# Altium PCB ROS_CAR.PcbDoc (part 6 of 13)
Units mil, origin at the board's own origin, x right, y up, seen from the top; angles counter-clockwise.
Board outline 3937.01 x 3937.01 mil, 2 copper layers (Top Layer, Bottom Layer); 201 components, 155 nets, 998 pads, 0 vias.
Unrouted connection lines stored in the file: 3.
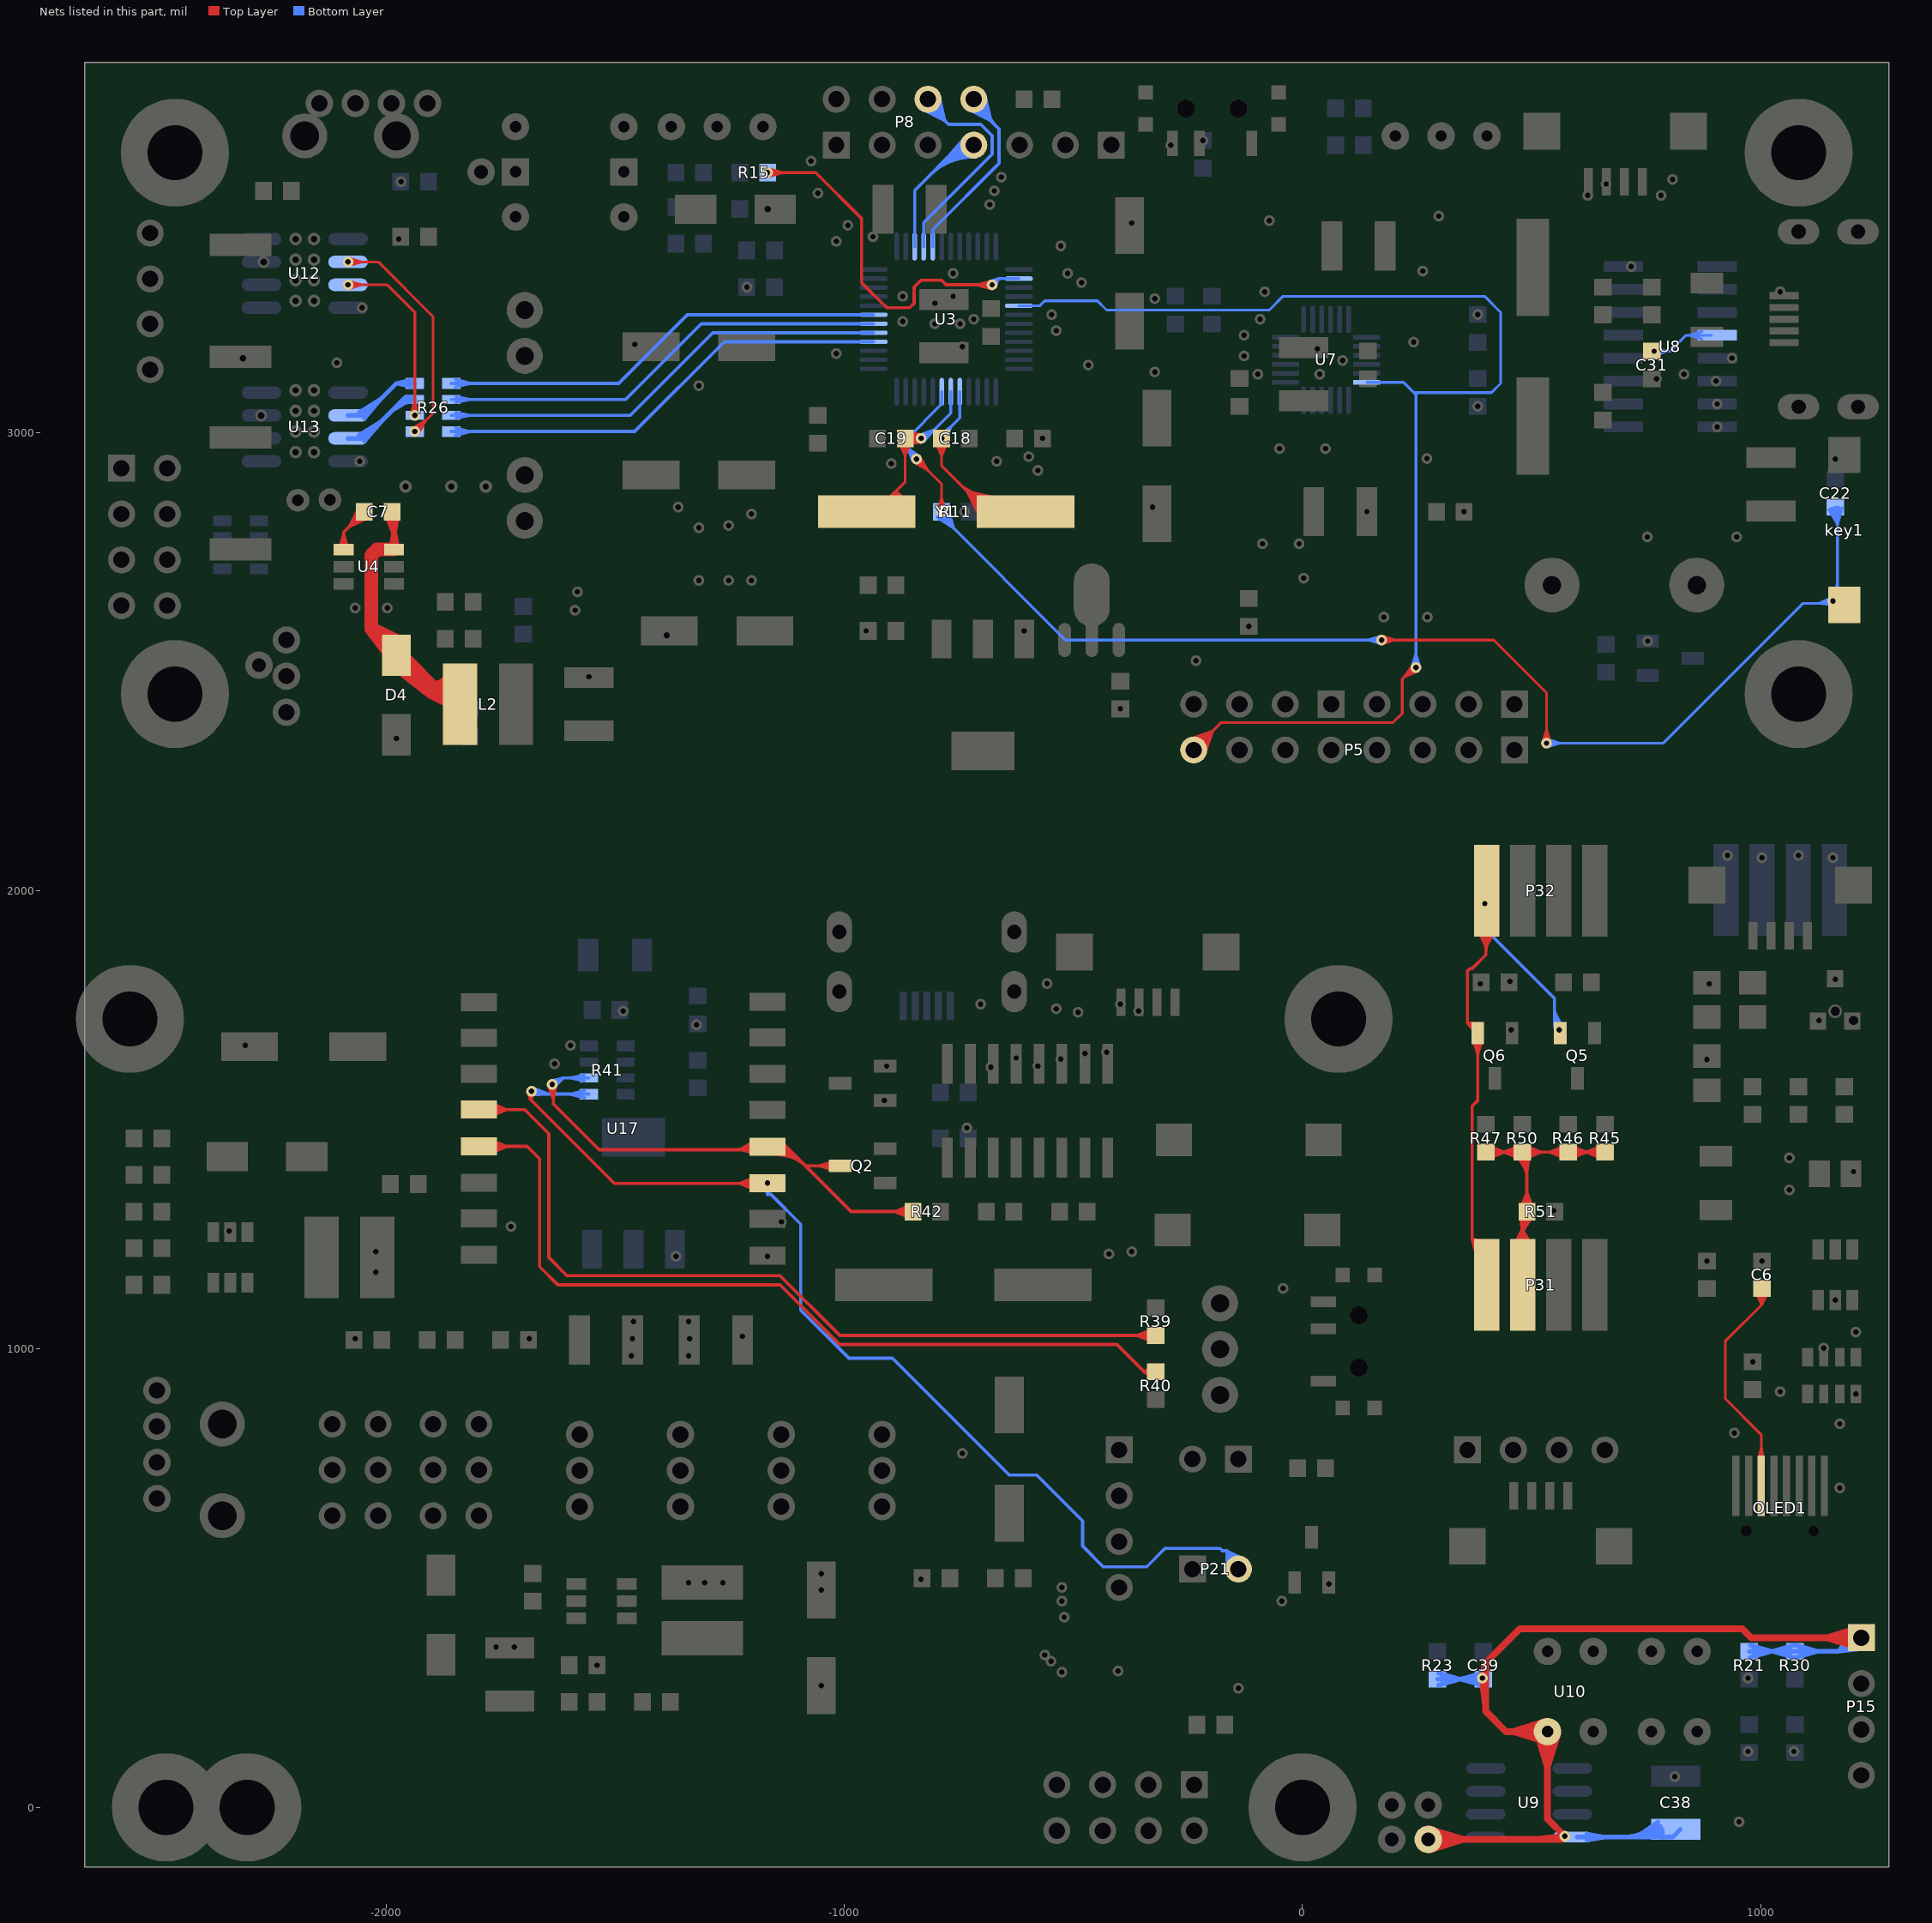
[diagram p6: the nets of this part, all layers, seen from the top]

## Nets (pads, with @x,y where several pads share a name; then routed paths per layer and width w, separated by ;. In a path a pad name is that pad's centre, name@x,y a point inside that pad or via, vN(x,y) a via of type N, cw(c..) or ccw(c..) an arc to the next point about the centre after c; other vN are vias at no path point) (continued)
GPIO0: pad.1@-1637.5,1577.5 Q2.3 R41.7 R42.1 U17.12 | length 5039.7
  Top Layer w7: pad.1@-1645.64,1575.84 -1635,1544.52 ; pad.1@-1643.38,1571.62 cw(c-1663.6,1551.4) -1635,1551.4 ; pad.1@-1637.5,1577.5 -1635,1544.52 ; -1635,1563.47 cw(c-1623.47,1563.47) pad.1@-1631.62,1571.62 ; pad.1@-1635,1575 -1635,1535 -1535,1435 U17.12@-1165,1435 ; pad.1@-1629.2,1577.08 -1635,1544.52 ; -1240.86,1435 ccw(c-1240.86,1494.64) U17.12@-1198.69,1452.47 ; -1223.96,1435 ccw(c-1223.96,1477.74) U17.12@-1193.74,1447.52 ; -1211.78,1435 cw(c-1211.78,1416.49) U17.12@-1198.69,1429.58 ; -1207.06,1435 ccw(c-1207.06,1460.84) U17.12@-1188.79,1442.57 ; U17.12@-1192.68,1456.27 -1228.27,1435 ; U17.12@-1189.58,1449.91 -1228.27,1435 ; U17.12@-1188.06,1424.86 -1228.27,1435 ; U17.12@-1187.24,1441.02 -1228.27,1435 ; U17.12@-1186.92,1431.84 -1228.27,1435 ; U17.12@-1167.56,1441.02 -1126.02,1441.02 ; U17.12@-1153.16,1425.73 -1101.4,1416.4 ; U17.12@-1151.45,1432.56 -1101.4,1416.4 ; U17.12@-1147.87,1424.84 cw(c-1147.87,1333.01) -1082.94,1397.94 ; U17.12@-1147.87,1431.84 cw(c-1147.87,1356.91) -1094.89,1409.89 ; U17.12@-1147.87,1438.84 cw(c-1147.87,1380.81) -1106.84,1421.84 ; U17.12@-1147.87,1445.84 cw(c-1147.87,1404.71) -1118.79,1433.79 ; U17.12@-1142.88,1448.73 -1101.4,1416.4 ; U17.12@-1138.19,1453.99 -1101.4,1416.4 ; U17.12@-1132.39,1436.31 cw(c-1126.02,1434.37) -1126.02,1441.02 ; U17.12@-1132.39,1445.74 ccw(c-1126.02,1447.68) -1126.02,1441.02 ; Q2.3@-1009.21,1400 -1082.15,1400 -1083.58,1398.58 ; R42.1@-860.79,1289.53 ccw(c-886.06,1264.25) -886.06,1300 ccw(c-886.06,1335.75) R42.1@-860.79,1310.47 ; R42.1@-855.84,1294.48 ccw(c-869.16,1281.15) -869.16,1300 ccw(c-869.16,1318.85) R42.1@-855.84,1305.52 ; R42.1@-853.1,1285.46 -889.62,1300 ; R42.1@-853.1,1314.54 -889.62,1300 ; R42.1@-851.09,1292.23 -889.62,1300 ; R42.1@-851.09,1307.77 -889.62,1300 ; R42.1@-850.31,1300 -985,1300 -1083.58,1398.58 ; U17.12@-1147.87,1441.02 -1126.02,1441.02 ; U17.12@-1147.87,1441.02 -1101.4,1416.4 ; U17.12@-1147.87,1441.02 -1126.02,1441.02 ; -1126.02,1441.02 -1145.94,1432.04 -1126.02,1441.02 ; -1126.02,1441.02 -1145.94,1450 -1126.02,1441.02 ; -1126.02,1441.02 -1141.88,1425.99 -1126.02,1441.02 ; -1126.02,1441.02 -1141.88,1456.06 -1126.02,1441.02 ; -1126.02,1441.02 -1083.58,1398.58 ; -1054.82,1400 Q2.3@-1020.04,1400 ; -1054.82,1400 Q2.3@-1021.56,1410.17 ; -1054.82,1400 Q2.3@-1021.56,1389.83 ; -1054.82,1400 Q2.3@-1020.04,1400 ; -1054.82,1400 Q2.3@-1021.56,1410.17 ; -1054.82,1400 Q2.3@-1021.56,1389.83 ; -1054.82,1400 Q2.3@-1020.04,1400 ; -1054.82,1400 Q2.3@-1021.56,1410.17 ; -1054.82,1400 Q2.3@-1021.56,1389.83 ; -1054.82,1400 Q2.3@-1020.04,1400 ; -1054.82,1400 Q2.3@-1021.56,1410.17 ; -1054.82,1400 Q2.3@-1021.56,1389.83 ; -1054.82,1400 Q2.3@-1020.04,1400 ; -1054.82,1400 Q2.3@-1021.56,1410.17 ; -1054.82,1400 Q2.3@-1021.56,1389.83 ; -1054.82,1400 Q2.3@-1020.04,1400 ; -1054.82,1400 Q2.3@-1021.56,1410.17 ; -1054.82,1400 Q2.3@-1021.56,1389.83 ; -1054.82,1400 Q2.3@-1020.04,1400 ; -1054.82,1400 Q2.3@-1021.56,1410.17 ; -1054.82,1400 Q2.3@-1021.56,1389.83 ; -1054.82,1400 Q2.3@-1020.04,1400 ; -1054.82,1400 Q2.3@-1021.56,1410.17 ; -1054.82,1400 Q2.3@-1021.56,1389.83 ; -1054.82,1400 Q2.3@-1020.04,1400 ; -1054.82,1400 Q2.3@-1021.56,1410.17 ; -1054.82,1400 Q2.3@-1021.56,1389.83 ; -1054.82,1400 Q2.3@-1020.04,1400 ; -1054.82,1400 Q2.3@-1021.56,1410.17 ; -1054.82,1400 Q2.3@-1021.56,1389.83 ; -1054.82,1400 Q2.3@-1020.04,1400 ; -1054.82,1400 Q2.3@-1021.56,1410.17 ; -1054.82,1400 Q2.3@-1021.56,1389.83 ; -1054.82,1400 Q2.3@-1020.04,1400 ; -1054.82,1400 Q2.3@-1021.56,1410.17 ; -1054.82,1400 Q2.3@-1021.56,1389.83 ; -1054.82,1400 Q2.3@-1020.04,1400 ; -1054.82,1400 Q2.3@-1021.56,1410.17 ; -1054.82,1400 Q2.3@-1021.56,1389.83 ; -1054.82,1400 Q2.3@-1020.04,1400 ; -1054.82,1400 Q2.3@-1021.56,1410.17 ; -1054.82,1400 Q2.3@-1021.56,1389.83 ; -1054.82,1400 Q2.3@-1020.04,1400 ; -1054.82,1400 Q2.3@-1021.56,1410.17 ; -1054.82,1400 Q2.3@-1021.56,1389.83 ; -1054.82,1400 Q2.3@-1020.04,1400 ; -1054.82,1400 Q2.3@-1021.56,1410.17 ; -1054.82,1400 Q2.3@-1021.56,1389.83 ; -1054.82,1400 Q2.3@-1020.04,1400 ; -1054.82,1400 Q2.3@-1021.56,1410.17 ; -1054.82,1400 Q2.3@-1021.56,1389.83 ; -1054.82,1400 Q2.3@-1020.04,1400 ; -1054.82,1400 Q2.3@-1021.56,1410.17 ; -1054.82,1400 Q2.3@-1021.56,1389.83 ; -1054.82,1400 Q2.3@-1020.04,1400 ; -1054.82,1400 Q2.3@-1021.56,1410.17 ; -1054.82,1400 Q2.3@-1021.56,1389.83 ; -1054.82,1400 Q2.3@-1020.04,1400 ; -1054.82,1400 Q2.3@-1021.56,1410.17 ; -1054.82,1400 Q2.3@-1021.56,1389.83 ; -1054.82,1400 Q2.3@-1020.04,1400 ; -1054.82,1400 Q2.3@-1021.56,1410.17 ; -1054.82,1400 Q2.3@-1021.56,1389.83 ; -1044.86,1400 cw(c-1044.86,1375.18) Q2.3@-1027.31,1392.73 ; -1044.86,1400 ccw(c-1044.86,1424.82) Q2.3@-1027.31,1407.27 ; -1044.86,1400 cw(c-1044.86,1375.18) Q2.3@-1027.31,1392.73 ; -1044.86,1400 ccw(c-1044.86,1424.82) Q2.3@-1027.31,1407.27 ; -1044.86,1400 cw(c-1044.86,1375.18) Q2.3@-1027.31,1392.73 ; -1044.86,1400 ccw(c-1044.86,1424.82) Q2.3@-1027.31,1407.27
  Bottom Layer w7: pad.1@-1640.55,1585.23 -1613.62,1591.38 ; pad.1@-1637.16,1578.77 ccw(c-1633.18,1593.75) -1622.21,1582.79 ; pad.1@-1635.36,1585.53 ccw(c-1629.57,1607.32) -1613.62,1591.38 ; pad.1@-1632.29,1571.02 -1613.62,1591.38 ; R41.7@-1572.08,1586.78 ccw(c-1583.17,1575.68) -1583.17,1591.38 ccw(c-1583.17,1607.07) R41.7@-1572.08,1595.97 ; R41.7@-1568.16,1584.91 -1598.48,1591.38 ; R41.7@-1568.16,1597.84 -1598.48,1591.38 ; R41.7@-1567.48,1591.38 -1598.48,1591.38 ; R41.7@-1557.48,1591.38 -1613.62,1591.38 ; -1613.62,1591.38 pad.1@-1637.5,1577.5 -1627.5,1577.5 -1613.62,1591.38
GPIO2: P21.2 pad.1@-1167.5,1362.5 pad.1@-1682.5,1562.5 R41.8 U17.11 | length 3760.5
  Top Layer w7: pad.1@-1690.77,1561.71 -1685,1545 ; pad.1@-1688.38,1556.62 cw(c-1696.53,1548.47) -1685,1548.47 ; -1685,1544.82 cw(c-1673.45,1544.82) pad.1@-1678.71,1555.1 ; pad.1@-1685,1560 -1685,1545 ; pad.1@-1682.5,1562.5 -1685,1545 ; pad.1@-1674.78,1559.42 -1685,1545 ; U17.11@-1198.69,1350.05 ccw(c-1226.32,1322.42) -1226.32,1361.5 ccw(c-1226.32,1400.57) U17.11@-1198.69,1372.94 ; U17.11@-1193.74,1355 ccw(c-1209.42,1339.32) -1209.42,1361.5 ccw(c-1209.42,1383.67) U17.11@-1193.74,1367.99 ; U17.11@-1190.46,1345.63 -1227.93,1361.5 ; U17.11@-1190.46,1377.36 -1227.93,1361.5 ; U17.11@-1189.99,1361.5 ccw(c-1189.99,1384.99) U17.11@-1173.38,1368.38 ; U17.11@-1188.28,1352.37 -1227.93,1361.5 ; U17.11@-1188.28,1370.62 -1227.93,1361.5 ; U17.11@-1187.24,1361.5 -1227.93,1361.5 ; U17.11@-1185.14,1361.5 cw(c-1185.14,1344.86) U17.11@-1173.38,1356.62 ; U17.11@-1168.8,1370.71 U17.11@-1200.35,1361.5 ; U17.11@-1168.3,1354.23 U17.11@-1200.35,1361.5 ; U17.11@-1167.56,1361.5 -1501.5,1361.5 -1685,1545 ; pad.1@-1167.5,1362.5 U17.11@-1200.35,1361.5
  Bottom Layer w7: pad.1@-1682.93,1554.2 -1644.79,1556.38 ; pad.1@-1681.57,1563.43 ccw(c-1664.56,1580.44) -1664.56,1556.38 ; pad.1@-1680.28,1570.51 -1644.79,1556.38 ; pad.1@-1676.62,1568.38 ccw(c-1647.66,1597.34) -1647.66,1556.38 ; R41.8@-1571.55,1550.5 ccw(c-1585.73,1536.31) -1585.73,1556.38 ccw(c-1585.73,1576.44) R41.8@-1571.55,1562.25 ; R41.8@-1566.72,1548.13 -1598.48,1556.38 ; R41.8@-1566.72,1564.62 -1598.48,1556.38 ; R41.8@-1565.67,1556.38 -1598.48,1556.38 ; R41.8@-1557.48,1556.38 -1671.38,1556.38 -1677.5,1562.5 pad.1@-1682.5,1562.5 -1644.79,1556.38 ; pad.1@-1175.7,1361.13 -1167.56,1337.56 ; pad.1@-1173.38,1356.62 cw(c-1187.42,1342.58) -1167.56,1342.58 ; -1167.56,1342.29 cw(c-1147.29,1342.29) pad.1@-1161.62,1356.62 ; pad.1@-1167.56,1361.5 -1167.56,1337.56 ; pad.1@-1167.5,1362.5 -1167.56,1337.56 ; pad.1@-1159.31,1361.1 -1167.56,1337.56 ; P21.2@-165.02,512.83 -165,560 ; -164.86,559.86 cw(c-186.86,537.85) P21.2@-157.78,526.77 ; -158.83,553.83 ccw(c-140,572.65) P21.2@-140,546.03 ; P21.2@-157.84,513.38 -165,560 ; -157.21,552.21 cw(c-175.79,533.64) P21.2@-151.24,524.28 ; P21.2@-150.93,514.98 -165,560 ; P21.2@-150,520 P21.2@-135,505 ; P21.2@-144.4,517.57 -165,560 ; P21.2@-135.88,522.89 -165,560 ; P21.2@-130.7,527.62 -165,560 ; P21.2@-126.23,533.13 -165,560 ; P21.2@-122.59,539.35 -165,560 ; -1167.56,1337.56 -1159.96,1337.56 -1095,1272.6 -1095,1085 -990,980 -895,980 -640,725 -580,725 -480,625 -480,570 -435,525 -340,525 -300,565 -180,565 -175,560 -165,560 ; -165,560 P21.2@-140,520 -135,525 -130,525 -165,560
GPIO14: R40.1 U17.5 | length 2267.7
  Top Layer w7: U17.5@-1797.48,1442.2 -1692.2,1442.2 -1665,1415 -1665,1180 -1625,1140 -1140,1140 -1010,1010 -405,1010 -345.31,950.31 ; U17.5@-1777.8,1442.2 -1737.11,1442.2 ; U17.5@-1776.76,1433.08 -1737.11,1442.2 ; U17.5@-1776.76,1451.33 -1737.11,1442.2 ; U17.5@-1774.58,1426.34 -1737.11,1442.2 ; U17.5@-1774.58,1458.07 -1737.11,1442.2 ; U17.5@-1771.3,1435.71 cw(c-1755.62,1420.03) -1755.62,1442.2 cw(c-1755.62,1464.38) U17.5@-1771.3,1448.7 ; U17.5@-1766.35,1430.76 cw(c-1738.72,1403.13) -1738.72,1442.2 cw(c-1738.72,1481.28) U17.5@-1766.35,1453.65 ; R40.1@-334.14,943.51 ccw(c-345.31,937.73) -345.31,950.31 ; R40.1@-334.14,957.12 cw(c-345.31,962.9) -345.31,950.31 ; R40.1@-325.49,936.21 -345.31,950.31 ; R40.1@-325.49,964.42 -345.31,950.31 ; R40.1@-322.24,942.61 -345.31,950.31 ; R40.1@-322.24,958.02 -345.31,950.31 ; R40.1@-320.98,950.31 -345.31,950.31 ; R40.1@-320,950.31 -345.31,950.31
GPIO16: R39.1 U17.4 | length 2421.7
  Top Layer w7: U17.4@-1797.48,1522.52 -1697.52,1522.52 -1645,1470 -1645,1200 -1605,1160 -1140,1160 -1009.69,1029.69 R39.1@-320,1029.69 ; U17.4@-1777.8,1522.52 -1737.11,1522.52 ; U17.4@-1776.76,1513.39 -1737.11,1522.52 ; U17.4@-1776.76,1531.65 -1737.11,1522.52 ; U17.4@-1774.58,1506.66 -1737.11,1522.52 ; U17.4@-1774.58,1538.38 -1737.11,1522.52 ; U17.4@-1771.3,1516.03 cw(c-1755.62,1500.35) -1755.62,1522.52 cw(c-1755.62,1544.69) U17.4@-1771.3,1529.01 ; U17.4@-1766.35,1511.08 cw(c-1738.72,1483.45) -1738.72,1522.52 cw(c-1738.72,1561.59) U17.4@-1766.35,1533.96 ; R39.1@-331.45,1019.21 ccw(c-356.73,993.94) -356.73,1029.69 ccw(c-356.73,1065.43) R39.1@-331.45,1040.16 ; R39.1@-326.5,1024.16 ccw(c-339.83,1010.84) -339.83,1029.69 ccw(c-339.83,1048.53) R39.1@-326.5,1035.21 ; R39.1@-323.77,1015.14 -360.29,1029.69 ; R39.1@-323.77,1044.23 -360.29,1029.69 ; R39.1@-321.76,1021.92 -360.29,1029.69 ; R39.1@-321.76,1037.45 -360.29,1029.69 ; R39.1@-320.98,1029.69 -360.29,1029.69
IN2-1: R26.6 U3.17 | length 1139.9
  Bottom Layer w7: R26.6@-1857.48,3037.09 -1467.48,3037.09 -1287.01,3217.56 U3.17@-935.94,3217.56 ; R26.6@-1847.48,3037.09 -1816.48,3037.09 ; R26.6@-1846.8,3030.62 -1816.48,3037.09 ; R26.6@-1846.8,3043.55 -1816.48,3037.09 ; R26.6@-1842.89,3032.49 cw(c-1831.79,3021.39) -1831.79,3037.09 cw(c-1831.79,3052.78) R26.6@-1842.89,3041.68 ; -987.46,3217.56 U3.17@-961.53,3217.56
IN2-2: R26.5 U3.16 | length 1158.5
  Bottom Layer w7: R26.5@-1857.48,3002.09 -1457.48,3002.09 -1261.69,3197.87 U3.16@-935.94,3197.87 ; R26.5@-1849.29,3002.09 -1816.48,3002.09 ; R26.5@-1848.24,2993.84 -1816.48,3002.09 ; R26.5@-1848.24,3010.33 -1816.48,3002.09 ; R26.5@-1843.42,2996.21 cw(c-1829.23,2982.02) -1829.23,3002.09 cw(c-1829.23,3022.15) R26.5@-1843.42,3007.96 ; -987.46,3197.87 U3.16@-961.53,3197.87
IN2_1: R26.1 U13.2 | length 487.5
  Bottom Layer w10: U13.2@-2082.99,3037.09 -2047.48,3037.09 -1977.48,3107.09 ; U13.2@-2058.62,3044.2 -2012,3072.57 ; U13.2@-2053.46,3037.09 -2012,3072.57 ; U13.2@-2053.46,3045.87 ccw(c-2053.46,3081.51) -2028.26,3056.31 ; U13.2@-2047.24,3030.9 -2012,3072.57 ; R26.1@-1950.49,3102.27 ccw(c-1962.11,3090.64) -1962.11,3107.09 ccw(c-1962.11,3123.53) R26.1@-1950.49,3111.9 ; R26.1@-1946.4,3100.31 -1977.48,3107.09 ; R26.1@-1946.4,3113.86 -1977.48,3107.09 ; R26.1@-1945.67,3107.09 -1977.48,3107.09 ; R26.1@-1937.48,3107.09 -1977.48,3107.09
IN2_2: R26.2 U13.3 | length 566
  Bottom Layer w10: U13.3@-2082.99,2987.09 -2047.48,2987.09 -1962.48,3072.09 ; U13.3@-2058.64,2994.18 -2011.35,3023.22 ; U13.3@-2053.46,2987.09 -2011.35,3023.22 ; U13.3@-2053.46,2995.87 ccw(c-2053.46,3031.51) -2028.26,3006.31 ; U13.3@-2047.24,2980.9 -2011.35,3023.22 ; -1987.11,3047.46 R26.2@-1947.48,3072.09 ; -1981.62,3052.95 cw(c-1947.48,3018.81) R26.2@-1947.48,3067.09 ; -1969.98,3064.59 cw(c-1957.81,3052.41) R26.2@-1949.81,3067.66 ; -1964.55,3070.02 cw(c-1947.48,3052.95) R26.2@-1947.48,3077.09 ; -1960.37,3074.2 cw(c-1951.19,3065.02) R26.2@-1945.16,3076.51 ; R26.2@-1951.02,3068.55 ccw(c-1959.55,3060.02) -1959.55,3072.09 ccw(c-1959.55,3084.16) R26.2@-1951.02,3075.62 ; R26.2@-1937.48,3072.09 -1962.48,3072.09 ; -1962.48,3072.09 R26.2@-1947.48,3072.09 ; -1962.48,3072.09 R26.2@-1947.48,3072.09
IN3-1: R26.7 U3.18 | length 1133.5
  Bottom Layer w7: R26.7@-1857.48,3072.09 -1477.48,3072.09 -1312.32,3237.24 U3.18@-935.94,3237.24 ; R26.7@-1847.48,3072.09 -1816.48,3072.09 ; R26.7@-1846.8,3065.62 -1816.48,3072.09 ; R26.7@-1846.8,3078.55 -1816.48,3072.09 ; R26.7@-1842.89,3067.49 cw(c-1831.79,3056.39) -1831.79,3072.09 cw(c-1831.79,3087.78) R26.7@-1842.89,3076.68 ; -987.46,3237.24 U3.18@-961.53,3237.24
IN3-2: R26.8 U3.19 | length 1139.5
  Bottom Layer w7: R26.8@-1857.48,3107.09 -1492.48,3107.09 -1342.64,3256.93 U3.19@-935.94,3256.93 ; R26.8@-1849.29,3107.09 -1816.48,3107.09 ; R26.8@-1848.24,3098.84 -1816.48,3107.09 ; R26.8@-1848.24,3115.33 -1816.48,3107.09 ; R26.8@-1843.42,3101.21 cw(c-1829.23,3087.02) -1829.23,3107.09 cw(c-1829.23,3127.15) R26.8@-1843.42,3112.96 ; -987.46,3256.93 U3.19@-961.53,3256.93
IN3_1: pad.1@-1937.48,3037.09 pad.1@-2082.99,3322.09 R26.3 U12.3 | length 581.4
  Top Layer w6: pad.1@-2082.99,3322.09 -1997.48,3322.09 -1937.48,3262.09 pad.1@-1937.48,3037.09 ; pad.1@-2081.69,3313.37 -2053.18,3322.09 pad.1@-2081.69,3330.8 ; pad.1@-2076.76,3315.86 cw(c-2061.72,3300.82) -2061.72,3322.09 cw(c-2061.72,3343.36) pad.1@-2076.76,3328.32 ; pad.1@-1946.2,3038.39 -1937.48,3066.9 pad.1@-1928.77,3038.39 ; pad.1@-1943.71,3043.32 ccw(c-1958.75,3058.36) -1937.48,3058.36 ccw(c-1916.21,3058.36) pad.1@-1931.25,3043.32
IN3_2: pad.1@-1937.48,3002.09 pad.1@-2082.99,3372.09 R26.4 U12.2 | length 697.9
  Top Layer w6: pad.1@-2082.99,3372.09 -2017.09,3372.09 -1897.48,3252.48 -1897.48,3042.09 pad.1@-1937.48,3002.09 ; pad.1@-2081.69,3363.37 -2053.18,3372.09 pad.1@-2081.69,3380.8 ; pad.1@-2076.76,3365.86 cw(c-2061.72,3350.82) -2061.72,3372.09 cw(c-2061.72,3393.36) pad.1@-2076.76,3378.32 ; pad.1@-1942.87,3009.06 -1912.94,3026.63 pad.1@-1930.51,2996.7 ; pad.1@-1937.48,3010.9 ccw(c-1937.48,3032.17) -1922.44,3017.13 ccw(c-1907.4,3002.09) pad.1@-1928.67,3002.09
IRQ: P8.8 U3.29 | length 1164.4
  Bottom Layer w7: U3.29@-807.01,3405.55 -807.01,3442.56 ; U3.29@-807.01,3431.14 -807.01,3442.56 ; P8.8@-733.95,3706.93 -680.21,3679.81 ; P8.8@-730.37,3713.09 -680.21,3679.81 ; P8.8@-726.13,3718.73 -680.21,3679.81 ; P8.8@-721.29,3723.81 -680.21,3679.81 ; P8.8@-717.48,3701.06 cw(c-717.48,3662.37) -690.12,3689.73 ; P8.8@-717.48,3708.06 cw(c-717.48,3686.27) -702.07,3701.68 ; P8.8@-713.41,3730.03 -680.21,3679.81 ; P8.8@-707.34,3733.55 -680.21,3679.81 ; P8.8@-705.46,3726.85 ccw(c-655.21,3725.89) -690.75,3690.35 ; P8.8@-700.86,3736.36 -680.21,3679.81 ; P8.8@-698.46,3726.72 ccw(c-632.39,3725.45) -679.11,3678.72 ; P8.8@-694.04,3738.4 -680.21,3679.81 ; P8.8@-691.46,3726.58 ccw(c-609.57,3725.01) -667.48,3667.09 ; -807.01,3442.56 -662.48,3587.09 -662.48,3662.09 -717.48,3717.09 P8.8@-717.48,3727.09 -680.21,3679.81
LED_POW: pad.1@-677.48,3322.09 pad.1@-1167.48,3567.09 R15.1 U3.38 | length 1122.1
  Top Layer w7: pad.1@-1167.48,3567.09 -1062.48,3567.09 -962.48,3467.09 -962.48,3327.09 -907.48,3272.09 -857.48,3272.09 -847.48,3282.09 -847.48,3317.09 -832.48,3332.09 -787.48,3332.09 -777.48,3322.09 pad.1@-677.48,3322.09 -710.29,3322.09 ; pad.1@-1166.43,3558.84 -1134.67,3567.09 pad.1@-1166.43,3575.33 ; pad.1@-1161.6,3561.21 cw(c-1147.42,3547.02) -1147.42,3567.09 cw(c-1147.42,3587.15) pad.1@-1161.6,3572.96 ; pad.1@-683.36,3316.21 ccw(c-697.54,3302.02) -697.54,3322.09 ccw(c-697.54,3342.15) pad.1@-683.36,3327.96 ; pad.1@-678.53,3313.84 -710.29,3322.09 ; pad.1@-678.53,3330.33 -710.29,3322.09
  Bottom Layer w7: pad.1@-681.95,3329.1 -663.9,3335.67 ; pad.1@-677.48,3322.09 -663.9,3335.67 ; pad.1@-677.22,3330.39 ccw(c-676.65,3348.42) -663.9,3335.67 ; pad.1@-670.47,3317.62 -663.9,3335.67 ; pad.1@-669.17,3322.35 cw(c-651.14,3322.91) -663.9,3335.67 ; U3.38@-644.61,3335.67 -663.9,3335.67 ; U3.38@-619.02,3335.67 -663.9,3335.67
M5V: P31.2 R45.1 R46.2 R47.1 R50.1 R51.2 | length 3679.9
  Top Layer w7: R47.1@400,1429.69 R50.1@480,1429.69 ; R47.1@400.98,1429.69 440.29,1429.69 ; R47.1@401.76,1421.92 440.29,1429.69 ; R47.1@401.76,1437.45 440.29,1429.69 ; R47.1@403.77,1415.14 440.29,1429.69 ; R47.1@403.77,1444.23 440.29,1429.69 ; R47.1@406.5,1424.16 cw(c419.83,1410.84) 419.83,1429.69 cw(c419.83,1448.53) R47.1@406.5,1435.21 ; R47.1@411.45,1419.21 cw(c436.73,1393.94) 436.73,1429.69 cw(c436.73,1465.43) R47.1@411.45,1440.16 ; P31.2@457.25,1218.1 480,1261 ; P31.2@463.62,1229.45 ccw(c424.07,1269) 480,1269 ; P31.2@463.8,1215.22 480,1261 ; R50.1@467.24,1424.18 489.68,1388.04 ; P31.2@468.57,1224.5 ccw(c440.97,1252.1) 480,1252.1 ; R50.1@468.55,1419.21 ccw(c443.27,1393.94) 443.27,1429.69 ccw(c443.27,1465.43) R50.1@468.55,1440.16 ; R50.1@470.51,1419.21 cw(c424.23,1372.93) 489.68,1372.93 ; P31.2@470.61,1213.35 480,1261 ; R50.1@473.5,1424.16 ccw(c460.17,1410.84) 460.17,1429.69 ccw(c460.17,1448.53) R50.1@473.5,1435.21 ; R50.1@473.52,1427.39 489.68,1388.04 ; R51.2@474.9,1299.81 480,1256.53 ; R51.2@475.14,1303.77 489.68,1340.29 ; R50.1@475.46,1424.16 cw(c441.13,1389.83) 489.68,1389.83 ; R50.1@476.23,1415.14 439.71,1429.69 ; R50.1@476.23,1444.23 439.71,1429.69 ; R50.1@478.24,1421.92 439.71,1429.69 ; R50.1@478.24,1437.45 439.71,1429.69 ; R50.1@479.02,1429.69 439.71,1429.69 ; R51.2@479.21,1311.45 ccw(c453.94,1336.73) 489.68,1336.73 ccw(c525.43,1336.73) R51.2@500.16,1311.45 ; P31.2@480,1150 480,1290.32 R51.2@489.68,1300 489.68,1425 485,1429.69 R45.1@660,1429.69 ; P31.2@480,1239.89 cw(c548.81,1239.89) R51.2@500.16,1288.55 ; 480,1255.15 ccw(c523.33,1255.15) P31.2@492.69,1224.5 ; 480,1256.79 cw(c531.91,1256.79) R51.2@495.21,1293.5 ; 480,1272.05 ccw(c540.23,1272.05) P31.2@497.64,1229.45 ; 480,1273.69 cw(c515.01,1273.69) R51.2@490.26,1298.45 ; R50.1@480.41,1429.11 cw(c458.03,1406.73) 489.68,1406.73 ; P31.2@480.63,1212.44 480,1261 ; R50.1@481.76,1421.92 520.29,1429.69 ; R50.1@481.76,1437.45 520.29,1429.69 ; R51.2@481.92,1301.76 489.68,1340.29 ; R51.2@481.95,1300.06 480,1256.53 ; R50.1@483.77,1415.14 520.29,1429.69 ; R50.1@483.77,1444.23 520.29,1429.69 ; R51.2@484.16,1306.5 ccw(c470.84,1319.83) 489.68,1319.83 ccw(c508.53,1319.83) R51.2@495.21,1306.5 ; R50.1@486.5,1424.16 cw(c499.83,1410.84) 499.83,1429.69 cw(c499.83,1448.53) R50.1@486.5,1435.21 ; R50.1@488.74,1430.57 489.68,1388.04 ; R51.2@489.68,1299.02 480,1256.53 ; R51.2@489.68,1300.98 489.68,1340.29 ; P31.2@490.62,1213.61 480,1261 ; R50.1@491.45,1419.21 cw(c516.73,1393.94) 516.73,1429.69 cw(c516.73,1465.43) R50.1@491.45,1440.16 ; R50.1@495.78,1430.14 489.68,1388.04 ; R51.2@497.11,1296.61 480,1256.53 ; P31.2@497.38,1215.65 480,1261 ; R51.2@497.45,1301.76 489.68,1340.29 ; R51.2@503.35,1293.32 480,1256.53 ; P31.2@503.86,1218.7 480,1261 ; R51.2@504.23,1303.77 489.68,1340.29 ; R46.2@568.55,1419.21 ccw(c543.27,1393.94) 543.27,1429.68 ccw(c543.27,1465.43) R46.2@568.55,1440.16 ; R46.2@573.5,1424.16 ccw(c560.17,1410.84) 560.17,1429.68 ccw(c560.17,1448.53) R46.2@573.5,1435.21 ; R46.2@576.23,1415.14 539.71,1429.68 ; R46.2@576.23,1444.23 539.71,1429.68 ; R46.2@578.24,1421.92 539.71,1429.68 ; R46.2@578.24,1437.45 539.71,1429.68 ; R46.2@579.02,1429.68 539.71,1429.68 ; R46.2@580.98,1429.68 620.29,1429.68 ; R46.2@581.76,1421.92 620.29,1429.68 ; R46.2@581.76,1437.45 620.29,1429.68 ; R46.2@583.77,1415.14 620.29,1429.68 ; R46.2@583.77,1444.23 620.29,1429.68 ; R46.2@586.5,1424.16 cw(c599.83,1410.84) 599.83,1429.68 cw(c599.83,1448.53) R46.2@586.5,1435.21 ; R46.2@591.45,1419.21 cw(c616.73,1393.94) 616.73,1429.68 cw(c616.73,1465.43) R46.2@591.45,1440.16 ; R45.1@648.55,1419.21 ccw(c623.27,1393.94) 623.27,1429.69 ccw(c623.27,1465.43) R45.1@648.55,1440.16 ; R45.1@653.5,1424.16 ccw(c640.17,1410.84) 640.17,1429.69 ccw(c640.17,1448.53) R45.1@653.5,1435.21 ; R45.1@656.23,1415.14 619.71,1429.69 ; R45.1@656.23,1444.23 619.71,1429.69 ; R45.1@658.24,1421.92 619.71,1429.69 ; R45.1@658.24,1437.45 619.71,1429.69 ; R45.1@659.02,1429.69 619.71,1429.69 ; 489.68,1388.04 480.98,1429.69 520.29,1429.69
MGND: P31.1 P32.1 pad.1@397.83,1972.09 pad.1@560.43,1696.3 Q5.2 Q6.2 | length 6542
  Top Layer w7: P31.1@378.32,1217.29 ccw(c356.18,1221.85) 372.17,1237.83 ccw(c384.54,1250.21) P31.1@391.85,1234.3 ; P32.1@378.37,1922.51 400,1879 ; P31.1@379.28,1230.72 ccw(c389.02,1240.46) P31.1@394.77,1227.94 ; P31.1@381.62,1199.48 370,1240 ; P32.1@384.88,1910.55 cw(c348.37,1874.04) 400,1874.04 ; P32.1@384.99,1925.22 400,1879 ; P31.1@388.35,1202.06 370,1240 ; P32.1@389.68,1970.5 P32.1@400,1939.12 ; P32.1@389.74,1973.95 P32.1@400,2000 ; P32.1@389.83,1915.5 cw(c365.27,1890.94) 400,1890.94 ; P32.1@391.85,1926.91 400,1879 ; P32.1@391.96,1966.21 cw(c372.54,1946.79) P32.1@400,1946.79 ; P32.1@391.96,1977.96 ccw(c372.54,1997.38) P32.1@400,1997.38 ; P31.1@394.45,1205.67 370,1240 ; 400,1864.91 cw(c464.54,1864.91) P32.1@418.9,1910.55 ; 400,1881.81 cw(c447.64,1881.81) P32.1@413.95,1915.5 ; 400,1898.71 cw(c430.74,1898.71) P32.1@409,1920.45 ; P32.1@400,1957.25 cw(c412.67,1957.25) P32.1@403.71,1966.21 ; P32.1@400,1986.92 ccw(c412.67,1986.92) P32.1@403.71,1977.96 ; P31.1@401.89,1212.44 370,1240 ; P32.1@401.89,1927.56 400,1879 ; P32.1@406.13,1971.58 P32.1@400,1939.12 ; P32.1@406.12,1972.68 P32.1@400,2000 ; P31.1@407.51,1220.78 370,1240 ; P31.1@410,1200 370,1240 ; P31.1@410.2,1227.34 370,1240 ; P31.1@411.77,1234.38 370,1240 ; P32.1@411.85,1926.13 400,1879 ; P32.1@418.55,1923.91 400,1879 ; P32.1@424.95,1920.7 400,1879 ; 360,1711.81 Q6.2@382.6,1700.04 ; 360,1711.81 Q6.2@385.41,1709.93 ; 360,1711.81 Q6.2@376.11,1692.07 ; 360,1711.81 Q6.2@382.6,1700.04 ; 360,1711.81 Q6.2@385.41,1709.93 ; 360,1711.81 Q6.2@376.11,1692.07 ; 360,1711.81 Q6.2@382.6,1700.04 ; 360,1711.81 Q6.2@385.41,1709.93 ; 360,1711.81 Q6.2@376.11,1692.07 ; 360,1711.81 Q6.2@382.6,1700.04 ; 360,1711.81 Q6.2@385.41,1709.93 ; 360,1711.81 Q6.2@376.11,1692.07 ; 360,1711.81 Q6.2@382.6,1700.04 ; 360,1711.81 Q6.2@385.41,1709.93 ; 360,1711.81 Q6.2@376.11,1692.07 ; 360,1711.81 Q6.2@382.6,1700.04 ; 360,1711.81 Q6.2@385.41,1709.93 ; 360,1711.81 Q6.2@376.11,1692.07 ; 360,1711.81 Q6.2@382.6,1700.04 ; 360,1711.81 Q6.2@385.41,1709.93 ; 360,1711.81 Q6.2@376.11,1692.07 ; 360,1711.81 Q6.2@382.6,1700.04 ; 360,1711.81 Q6.2@385.41,1709.93 ; 360,1711.81 Q6.2@376.11,1692.07 ; 360,1711.81 Q6.2@382.6,1700.04 ; 360,1711.81 Q6.2@385.41,1709.93 ; 360,1711.81 Q6.2@376.11,1692.07 ; 360,1711.81 Q6.2@382.6,1700.04 ; 360,1711.81 Q6.2@385.41,1709.93 ; 360,1711.81 Q6.2@376.11,1692.07 ; 360,1711.81 Q6.2@382.6,1700.04 ; 360,1711.81 Q6.2@385.41,1709.93 ; 360,1711.81 Q6.2@376.11,1692.07 ; 360,1711.81 Q6.2@382.6,1700.04 ; 360,1711.81 Q6.2@385.41,1709.93 ; 360,1711.81 Q6.2@376.11,1692.07 ; 360,1711.81 Q6.2@382.6,1700.04 ; 360,1711.81 Q6.2@385.41,1709.93 ; 360,1711.81 Q6.2@376.11,1692.07 ; 360,1711.81 Q6.2@382.6,1700.04 ; 360,1711.81 Q6.2@385.41,1709.93 ; 360,1711.81 Q6.2@376.11,1692.07 ; 360,1711.81 Q6.2@382.6,1700.04 ; 360,1711.81 Q6.2@385.41,1709.93 ; 360,1711.81 Q6.2@376.11,1692.07 ; 360,1711.81 Q6.2@382.6,1700.04 ; 360,1711.81 Q6.2@385.41,1709.93 ; 360,1711.81 Q6.2@376.11,1692.07 ; 360,1711.81 Q6.2@382.6,1700.04 ; 360,1711.81 Q6.2@385.41,1709.93 ; 360,1711.81 Q6.2@376.11,1692.07 ; 360,1711.81 Q6.2@382.6,1700.04 ; 360,1711.81 Q6.2@385.41,1709.93 ; 360,1711.81 Q6.2@376.11,1692.07 ; 360,1711.81 Q6.2@382.6,1700.04 ; 360,1711.81 Q6.2@385.41,1709.93 ; 360,1711.81 Q6.2@376.11,1692.07 ; 360,1711.81 Q6.2@382.6,1700.04 ; 360,1711.81 Q6.2@385.41,1709.93 ; 360,1711.81 Q6.2@376.11,1692.07 ; 360,1711.81 Q6.2@382.6,1700.04 ; 360,1711.81 Q6.2@385.41,1709.93 ; 360,1711.81 Q6.2@376.11,1692.07 ; 360,1711.81 360,1825 365,1830 370,1830 400,1860 P32.1@400,2000 ; 360,1711.81 Q6.2@382.6,1689.21 382.6,1542.6 370,1530 370,1240 ; Q6.2@372.43,1676.87 382.6,1643.61 ; Q6.2@372.43,1676.87 382.6,1643.61 ; Q6.2@372.43,1676.87 382.6,1643.61 ; Q6.2@372.43,1676.87 382.6,1643.61 ; Q6.2@372.43,1676.87 382.6,1643.61 ; Q6.2@372.43,1676.87 382.6,1643.61 ; Q6.2@372.43,1676.87 382.6,1643.61 ; Q6.2@372.43,1676.87 382.6,1643.61 ; Q6.2@372.43,1676.87 382.6,1643.61 ; Q6.2@372.43,1676.87 382.6,1643.61 ; Q6.2@372.43,1676.87 382.6,1643.61 ; Q6.2@372.43,1676.87 382.6,1643.61 ; Q6.2@372.43,1676.87 382.6,1643.61 ; Q6.2@372.43,1676.87 382.6,1643.61 ; Q6.2@372.43,1676.87 382.6,1643.61 ; Q6.2@372.43,1676.87 382.6,1643.61 ; Q6.2@372.43,1676.87 382.6,1643.61 ; Q6.2@372.43,1676.87 382.6,1643.61 ; Q6.2@372.43,1676.87 382.6,1643.61 ; Q6.2@372.43,1676.87 382.6,1643.61 ; Q6.2@372.43,1676.87 382.6,1643.61 ; Q6.2@375.33,1671.12 cw(c357.78,1653.57) 382.6,1653.57 ; Q6.2@375.33,1671.12 cw(c357.78,1653.57) 382.6,1653.57 ; Q6.2@375.33,1671.12 cw(c357.78,1653.57) 382.6,1653.57 ; 382.6,1643.61 Q6.2@382.6,1678.39 ; 382.6,1643.61 Q6.2@392.76,1676.87 ; 382.6,1643.61 Q6.2@382.6,1678.39 ; 382.6,1643.61 Q6.2@392.76,1676.87 ; 382.6,1643.61 Q6.2@382.6,1678.39 ; 382.6,1643.61 Q6.2@392.76,1676.87 ; 382.6,1643.61 Q6.2@382.6,1678.39 ; 382.6,1643.61 Q6.2@392.76,1676.87 ; 382.6,1643.61 Q6.2@382.6,1678.39 ; 382.6,1643.61 Q6.2@392.76,1676.87 ; 382.6,1643.61 Q6.2@382.6,1678.39 ; 382.6,1643.61 Q6.2@392.76,1676.87 ; 382.6,1643.61 Q6.2@382.6,1678.39 ; 382.6,1643.61 Q6.2@392.76,1676.87 ; 382.6,1643.61 Q6.2@382.6,1678.39 ; 382.6,1643.61 Q6.2@392.76,1676.87 ; 382.6,1643.61 Q6.2@382.6,1678.39 ; 382.6,1643.61 Q6.2@392.76,1676.87 ; 382.6,1643.61 Q6.2@382.6,1678.39 ; 382.6,1643.61 Q6.2@392.76,1676.87 ; 382.6,1643.61 Q6.2@382.6,1678.39 ; 382.6,1643.61 Q6.2@392.76,1676.87 ; 382.6,1643.61 Q6.2@382.6,1678.39 ; 382.6,1643.61 Q6.2@392.76,1676.87 ; 382.6,1643.61 Q6.2@382.6,1678.39 ; 382.6,1643.61 Q6.2@392.76,1676.87 ; 382.6,1643.61 Q6.2@382.6,1678.39 ; 382.6,1643.61 Q6.2@392.76,1676.87 ; 382.6,1643.61 Q6.2@382.6,1678.39 ; 382.6,1643.61 Q6.2@392.76,1676.87 ; 382.6,1643.61 Q6.2@382.6,1678.39 ; 382.6,1643.61 Q6.2@392.76,1676.87 ; 382.6,1643.61 Q6.2@382.6,1678.39 ; 382.6,1643.61 Q6.2@392.76,1676.87 ; 382.6,1643.61 Q6.2@382.6,1678.39 ; 382.6,1643.61 Q6.2@392.76,1676.87 ; 382.6,1643.61 Q6.2@382.6,1678.39 ; 382.6,1643.61 Q6.2@392.76,1676.87 ; 382.6,1643.61 Q6.2@382.6,1678.39 ; 382.6,1643.61 Q6.2@392.76,1676.87 ; 382.6,1643.61 Q6.2@382.6,1678.39 ; 382.6,1643.61 Q6.2@392.76,1676.87 ; 382.6,1653.57 cw(c407.42,1653.57) Q6.2@389.87,1671.12 ; 382.6,1653.57 cw(c407.42,1653.57) Q6.2@389.87,1671.12 ; 382.6,1653.57 cw(c407.42,1653.57) Q6.2@389.87,1671.12 ; P32.1@400,1939.12 pad.1@397.83,1972.09 P32.1@400,2000
  Bottom Layer w7: pad.1@389.59,1971.03 397.83,1939.28 pad.1@406.08,1971.03 ; pad.1@391.96,1966.21 cw(c377.77,1952.02) 397.83,1952.02 cw(c417.9,1952.02) pad.1@403.71,1966.21 ; pad.1@397.83,1972.09 397.83,1917.17 550,1765 550,1706.73 pad.1@560.43,1696.3 550,1736.48 ; 550,1707.75 ccw(c571.89,1707.75) pad.1@556.41,1692.28 ; 550,1724.65 ccw(c588.79,1724.65) pad.1@561.36,1697.23 ; 550,1741.55 ccw(c605.68,1741.55) pad.1@566.31,1702.18 ; pad.1@552.22,1695.03 550,1736.48 ; pad.1@568.23,1699.18 550,1736.48
MISO: P8.7 U3.27 | length 1371
  Bottom Layer w7: U3.27@-846.38,3405.55 -846.38,3528.19 -747.48,3627.09 P8.7@-717.48,3627.09 -778.35,3596.21 ; U3.27@-846.38,3431.14 -846.38,3457.06 ; -813.13,3561.44 cw(c-717.48,3465.8) P8.7@-717.48,3601.06 ; -801.18,3573.39 cw(c-717.48,3489.7) P8.7@-717.48,3608.06 ; -789.23,3585.34 cw(c-717.48,3513.6) P8.7@-717.48,3615.06 ; -777.28,3597.29 cw(c-717.48,3537.5) P8.7@-717.48,3622.06 ; -765.33,3609.24 cw(c-717.48,3561.4) P8.7@-717.48,3629.06 ; -753.38,3621.19 cw(c-717.48,3585.29) P8.7@-717.48,3636.06 ; P8.7@-733.46,3647.63 -778.35,3596.21 ; P8.7@-728.37,3642.69 -778.35,3596.21 ; P8.7@-723.84,3637.29 -778.35,3596.21 ; P8.7@-719.92,3631.48 -778.35,3596.21 ; P8.7@-715.37,3622.52 -778.35,3596.21 ; P8.7@-713.01,3615.92 -778.35,3596.21 ; P8.7@-711.32,3609.08 -778.35,3596.21 ; P8.7@-710.35,3602.06 -778.35,3596.21
MOSI: P8.6 U3.28 | length 1203.6
  Bottom Layer w7: P8.6@-833.93,3706.92 -780.67,3680.27 ; P8.6@-830.37,3713.09 -780.67,3680.27 ; U3.28@-826.69,3405.55 -826.69,3457.87 -677.48,3607.09 -677.48,3647.48 -702.09,3672.09 -772.48,3672.09 P8.6@-817.48,3717.09 ; U3.28@-826.69,3431.14 -826.69,3457.06 ; P8.6@-826.14,3718.74 -780.67,3680.27 ; P8.6@-821.3,3723.82 -780.67,3680.27 ; P8.6@-817.48,3701.06 cw(c-817.48,3662.37) -790.12,3689.73 ; P8.6@-817.48,3708.06 cw(c-817.48,3686.27) -802.07,3701.68 ; P8.6@-817.48,3727.09 -780.67,3680.27 ; P8.6@-813.4,3730.03 -780.67,3680.27 ; P8.6@-807.32,3733.53 -780.67,3680.27 ; P8.6@-805.63,3725.01 ccw(c-773.31,3719.33) -796.52,3696.12 ; P8.6@-800.84,3736.31 -780.67,3680.27 ; P8.6@-798.74,3723.8 ccw(c-757.12,3716.49) -787,3686.61 ; P8.6@-794,3738.32 -780.67,3680.27 ; P8.6@-791.85,3722.59 ccw(c-740.93,3713.64) -777.48,3677.09
MOTO_VCC5V: C38.1 C39.1 P15.1 pad.0@274.53,-69.92 pad.1@392.52,282.09 pad.1@572.52,-62.91 R21.1 R23.1 R30.1 U9.8 U10.1 | length 6095.6
  Top Layer w15: pad.0@274.53,-69.92 565.51,-69.92 pad.1@572.52,-62.91 ; pad.0@277.9,-92.17 349.53,-69.92 pad.0@277.9,-47.68 ; pad.0@290.44,-85.83 cw(c328.85,-124.24) 328.85,-69.92 cw(c328.85,-15.6) pad.0@290.44,-54.01 ; pad.1@389.47,279.04 cw(c365.19,254.76) 399.53,254.76 ; pad.1@389.47,285.14 ccw(c365.19,309.41) 399.53,309.41 ; 399.53,223.9 pad.1@392.52,282.09 399.53,315.08 ; 512.24,-69.92 pad.1@572.52,-62.91 ; U10.1@512.36,161.98 534.61,90.35 U10.1@556.85,161.98 ; U10.1@518.7,181.26 cw(c480.29,219.67) 480.29,165.35 cw(c480.29,111.03) 518.7,149.44 cw(c480.29,111.03) 534.61,111.03 cw(c588.93,111.03) U10.1@550.52,149.44 ; U10.1@531.23,143.11 459.61,165.35 U10.1@531.23,187.6 ; 545.19,-69.92 ccw(c545.19,-35.59) pad.1@569.47,-59.86 ; P15.1@1203.95,354.5 ccw(c1166.35,316.9) 1166.35,370.08 ccw(c1166.35,423.26) P15.1@1203.95,385.65 ; P15.1@1214.53,370.08 979.53,370.08 959.53,390.08 474.53,390.08 399.53,315.08 ; P15.1@1216.27,348.29 1145,370.08 ; P15.1@1216.27,391.86 1145,370.08 ; P15.1@1219.53,370.08 1145,370.08 ; 399.53,315.08 399.53,210.08 444.25,165.35 U10.1@534.61,165.35 534.61,-25 pad.1@572.52,-62.91
  Bottom Layer w10: R23.1@295.51,279.76 343.82,279.76 ; R23.1@297.34,266.58 343.82,279.76 ; R23.1@297.34,292.94 343.82,279.76 ; R23.1@304.53,279.76 C39.1@404.53,279.76 ; R23.1@304.92,270.35 cw(c327.64,247.64) 327.64,279.76 cw(c327.64,311.89) R23.1@304.92,289.17 ; 370.47,279.76 ccw(c370.47,304.14) C39.1@387.7,286.9 ; C39.1@384.13,270.35 ccw(c361.42,247.64) 361.42,279.76 ccw(c361.42,311.89) C39.1@384.13,289.17 ; C39.1@385.81,280.94 C39.1@391.71,266.58 ; C39.1@391.7,288.85 345.24,279.76 ; C39.1@391.71,292.94 345.24,279.76 ; C39.1@391.75,288.85 347.58,280.43 ; C39.1@392.25,275.28 347.58,280.43 ; C39.1@392.36,275.28 345.24,279.76 ; C39.1@393.14,275.3 C39.1@404.53,279.76 ; C39.1@393.54,279.76 345.24,279.76 ; C39.1@395.62,288.15 C39.1@404.53,279.76 ; C39.1@399.08,280.25 C39.1@391.71,266.58 ; C39.1@399.08,283.9 ccw(c404.53,285.41) C39.1@404.53,279.76 ; U9.8@599.02,-64.92 807.6,-64.92 C38.1@824.53,-47.99 ; U9.8@620.51,-64.92 662.32,-64.92 ; U9.8@621.07,-71.71 662.32,-64.92 ; U9.8@621.07,-58.13 662.32,-64.92 ; U9.8@625.33,-69.74 cw(c636.96,-81.36) 636.96,-64.92 cw(c636.96,-48.48) U9.8@625.33,-60.11 ; 699.89,-64.92 ccw(c699.89,35.93) C38.1@771.21,-35.38 ; 724.03,-64.92 ccw(c724.03,11.79) C38.1@778.28,-42.45 ; 748.18,-64.92 ccw(c748.18,-12.35) C38.1@785.35,-49.52 ; C38.1@775.94,-31.99 729.28,-64.92 ; C38.1@780.99,-40.69 729.28,-64.92 ; C38.1@783.82,-47.99 729.28,-64.92 ; C38.1@785.62,-55.62 729.28,-64.92 ; C38.1@786.38,-65.64 729.28,-64.92 ; R21.1@975.51,340.39 1023.82,340.39 ; R21.1@977.34,327.21 1023.82,340.39 ; R21.1@977.34,353.57 1023.82,340.39 ; R21.1@984.53,340.39 1169.84,340.39 ; R21.1@984.92,330.98 cw(c1007.64,308.27) 1007.64,340.39 cw(c1007.64,372.52) R21.1@984.92,349.8 ; R30.1@1064.13,330.98 ccw(c1041.42,308.27) 1041.42,340.39 ccw(c1041.42,372.52) R30.1@1064.13,349.8 ; R30.1@1071.71,327.21 1025.24,340.39 ; R30.1@1071.71,353.57 1025.24,340.39 ; R30.1@1073.54,340.39 1025.24,340.39 ; R30.1@1075.51,340.39 1123.82,340.39 ; R30.1@1077.34,327.21 1123.82,340.39 ; R30.1@1077.34,353.57 1123.82,340.39 ; R30.1@1084.92,330.98 cw(c1107.64,308.27) 1107.64,340.39 cw(c1107.64,372.52) R30.1@1084.92,349.8 ; 1172.69,343.24 cw(c1206.02,309.92) P15.1@1216.35,355.9 ; 1185.54,356.09 cw(c1210.73,330.9) P15.1@1218.54,365.66 ; P15.1@1202.77,387.99 1169.84,340.39 ; P15.1@1210.57,381.52 1169.84,340.39 ; P15.1@1219.53,370.08 1169.84,340.39 ; P15.1@1224.53,370.08 1199.53,370.08 1169.84,340.39 ; P15.1@1225.35,356.77 1169.84,340.39 ; P15.1@1227.36,346.84 1169.84,340.39 ; 345.24,279.76 pad.1@392.52,282.09 ; 345.24,279.76 C39.1@391.71,266.58 ; 347.58,280.43 pad.1@392.52,282.09 ; 350.54,279.76 pad.1@392.52,282.09 ; 350.54,279.76 391.59,288.83 350.59,279.76 ; 350.54,279.76 392.34,275.28 350.59,279.76 ; 350.59,279.76 pad.1@392.52,282.09 ; C39.1@391.71,266.58 pad.1@392.52,282.09 ; pad.1@392.52,282.09 C39.1@404.53,279.76
MPU6050_INT: P5.8 pad.1@247.52,2487.09 U3.41 U7.12 | length 3818.4
  Top Layer w6: P5.8@-251.61,2329.54 -195.22,2349.34 ; P5.8@-249.29,2323.88 -195.22,2349.34 ; P5.8@-246.43,2318.53 -195.22,2349.34 ; P5.8@-243.06,2313.53 -195.22,2349.34 ; P5.8@-237.48,2321.61 ccw(c-237.48,2356.69) -212.68,2331.89 ccw(c-187.88,2307.09) P5.8@-222.95,2307.09 ; P5.8@-237.48,2327.61 ccw(c-237.48,2377.17) -202.44,2342.13 ccw(c-167.39,2307.09) P5.8@-216.95,2307.09 ; P5.8@-237.48,2333.61 ccw(c-237.48,2397.66) -192.2,2352.37 ccw(c-146.91,2307.09) P5.8@-210.95,2307.09 ; P5.8@-231.04,2301.5 -195.22,2349.34 ; P5.8@-226.04,2298.14 -195.22,2349.34 ; P5.8@-220.69,2295.28 -195.22,2349.34 ; P5.8@-215.03,2292.96 -195.22,2349.34 ; 223.94,2468.51 cw(c247.52,2444.93) pad.1@247.52,2478.28 ; 234.19,2478.75 cw(c247.52,2465.42) pad.1@247.52,2484.28 ; 236.01,2480.58 ccw(c229.51,2487.09) pad.1@238.71,2487.09 ; pad.1@241.13,2493.15 221.33,2465.9 ; pad.1@242.52,2487.09 217.52,2462.09 217.52,2387.09 197.52,2367.09 -177.48,2367.09 P5.8@-237.48,2307.09 -195.22,2349.34 ; pad.1@247.52,2487.09 221.33,2465.9 ; pad.1@252.12,2479.57 221.33,2465.9
  Bottom Layer w6: U3.41@-619.02,3276.61 -572.95,3276.61 ; U3.41@-593.43,3276.61 -572.95,3276.61 ; P5.8@-237.48,2307.09 P5.8@-232.48,2307.09 ; U7.12@140.31,3109.29 220.31,3109.29 247.52,3082.09 pad.1@247.52,2487.09 ; U7.12@164.92,3109.29 187.84,3109.29 ; pad.1@238.81,2488.39 247.52,2516.9 pad.1@256.23,2488.39 ; pad.1@241.29,2493.32 ccw(c226.25,2508.36) 247.52,2508.36 ccw(c268.79,2508.36) pad.1@253.75,2493.32 ; 242.52,3087.09 412.52,3087.09 432.52,3107.09 432.52,3262.09 397.52,3297.09 -42.48,3297.09 -72.48,3267.09 -427.48,3267.09 -447.48,3287.09 -562.48,3287.09 -572.95,3276.61
NetC6_1: C6.1 OLED1.3 | length 884.2
  Top Layer w6: C6.1@987.59,1128.39 1002.52,1097.09 ; C6.1@992.2,1120.46 cw(c970.88,1097.09) 1002.52,1097.09 ; C6.1@993.3,1130.52 1002.52,1097.09 ; C6.1@996.25,1124.9 cw(c983.28,1110.68) 1002.52,1110.68 cw(c1021.76,1110.68) C6.1@1008.79,1124.9 ; OLED1.3@996.33,760.62 1001.18,786.03 ; OLED1.3@997.73,763.6 ccw(c989.41,771.92) 1001.18,771.92 ccw(c1012.95,771.92) OLED1.3@1004.63,763.6 ; C6.1@999.22,1131.61 1002.52,1097.09 ; OLED1.3@1001.18,702.09 1001.18,813.43 922.52,892.09 922.52,1017.09 1002.52,1097.09 ; OLED1.3@1001.18,760.16 1001.18,786.03 ; C6.1@1002.52,1131.77 1002.52,1097.09 ; C6.1@1005.82,1131.61 1002.52,1097.09 ; OLED1.3@1006.03,760.62 1001.18,786.03 ; C6.1@1011.74,1130.52 1002.52,1097.09 ; C6.1@1012.84,1120.46 ccw(c1034.16,1097.09) 1002.52,1097.09 ; C6.1@1017.45,1128.39 1002.52,1097.09
NetC7_1: C7.1 U4.1 | length 507.8
  Top Layer w7: U4.1@-2101.81,2745.77 -2092.6,2778.28 U4.1@-2083.39,2745.77 ; U4.1@-2099.17,2751.06 ccw(c-2115.04,2766.93) -2092.6,2766.93 ccw(c-2070.16,2766.93) U4.1@-2086.03,2751.06 ; U4.1@-2092.6,2744.49 -2092.6,2782.28 C7.1@-2047.8,2827.09 ; -2074.75,2800.13 cw(c-2047.8,2773.17) C7.1@-2047.8,2811.3 ; -2072.38,2802.51 ccw(c-2095.97,2826.1) C7.1@-2062.6,2826.1 ; C7.1@-2062.8,2812.08 cw(c-2047.8,2797.07) C7.1@-2047.8,2818.3 ; C7.1@-2059.68,2834.94 -2080.95,2793.93 ; C7.1@-2053.69,2831.23 -2080.95,2793.93 ; C7.1@-2047.8,2826.1 -2080.95,2793.93 ; C7.1@-2042.85,2820.06 -2080.95,2793.93 ; C7.1@-2039.32,2813.96 -2080.95,2793.93
NetC7_2: C7.2 D4.2 L2.1 U4.6 | length 1444.2
  Top Layer w10: C7.2@-2000.11,2823.01 -1982.36,2777.45 ; C7.2@-1996.57,2816.69 cw(c-2030.89,2782.38) -1982.36,2782.38 ; U4.6@-1990.13,2745.2 -1982.36,2787.28 U4.6@-1974.6,2745.2 ; C7.2@-1989.5,2823.76 cw(c-2006.74,2806.52) -1982.36,2806.52 ; U4.6@-1987.87,2750 ccw(c-2001.18,2763.31) -1982.36,2763.31 ccw(c-1963.54,2763.31) U4.6@-1976.85,2750 ; C7.2@-1987.17,2826.1 -1982.36,2777.45 ; U4.6@-1982.36,2744.49 C7.2@-1982.36,2827.09 ; -1982.36,2805.57 cw(c-1966.63,2805.57) C7.2@-1977.76,2816.69 ; C7.2@-1973.87,2825.6 -1982.36,2777.45
  Top Layer w30: -2023.38,2562.99 ccw(c-1977.48,2608.89) D4.2@-1977.48,2543.98 ; U4.6@-1991.22,2744.49 -2020.08,2744.49 ; D4.2@-1989.29,2515.97 -2032.48,2572.09 ; U4.6@-1982.36,2744.49 -2020.08,2744.49 ; D4.2@-1977.48,2527.48 -2032.48,2572.09 ; D4.2@-1968.65,2541.42 -2032.48,2572.09 ; D4.2@-1966.05,2505.66 -2032.48,2572.09 ; -2032.48,2572.09 -2032.48,2732.09 -2020.08,2744.49
  Top Layer w40: D4.2@-1977.48,2488.43 cw(c-1977.48,2419.23) -1928.55,2468.16 ; D4.2@-1977.48,2499.92 -1897.48,2437.09 ; D4.2@-1966.05,2505.66 -1897.48,2437.09 ; L2.1@-1854.45,2465.24 cw(c-1897.48,2484.05) -1897.48,2437.09 ; L2.1@-1842.48,2437.09 -1897.48,2437.09 ; L2.1@-1838.5,2407.09 -1897.48,2437.09
NetC18_2: C18.2 pad.1@-787.48,2987.09 U3.5 Y1.2 | length 2524.5
  Top Layer w6: C18.2@-802.73,2982.75 -787.48,2949.79 ; C18.2@-798.62,2975.28 cw(c-825.51,2948.39) -787.48,2948.39 ; C18.2@-797.02,2984.83 -787.48,2949.79 ; C18.2@-796.22,2986.01 -788.18,2956.82 ; C18.2@-796.25,2986.24 -788.74,2954.44 ; C18.2@-796.16,2985.55 -786.22,2954.75 ; C18.2@-796.17,2985.63 -786.89,2956.96 ; C18.2@-794.38,2979.52 cw(c-811.03,2962.87) -787.48,2962.87 ; C18.2@-793.71,2980.86 cw(c-808.75,2965.82) -787.48,2965.82 cw(c-766.21,2965.82) C18.2@-781.25,2980.86 ; C18.2@-791.1,2985.92 -787.48,2949.79 ; C18.2@-787.8,2986.1 -787.48,2949.79 ; -787.48,2949.91 cw(c-751.6,2949.91) C18.2@-776.97,2975.28 ; -787.48,2964.39 cw(c-766.09,2964.39) C18.2@-781.21,2979.52 ; C18.2@-784.49,2985.98 -787.48,2949.79 ; C18.2@-778.74,2985.97 -786.89,2956.96 ; C18.2@-778.71,2986.23 -786.22,2954.75 ; C18.2@-778.56,2984.99 -787.48,2949.79 ; C18.2@-772.8,2983.01 -787.48,2949.79 ; -751.59,2891.19 ccw(c-675.12,2967.66) Y1.2@-675.12,2859.52 ; -741.35,2880.95 ccw(c-675.12,2947.18) Y1.2@-675.12,2853.52 ; -731.1,2870.71 ccw(c-675.12,2926.69) Y1.2@-675.12,2847.52 ; -721.74,2861.35 cw(c-756.01,2827.09) Y1.2@-707.55,2827.09 ; -720.86,2860.47 ccw(c-675.12,2906.21) Y1.2@-675.12,2841.52 ; -711.5,2851.11 cw(c-735.52,2827.09) Y1.2@-701.55,2827.09 ; -710.62,2850.22 ccw(c-675.12,2885.72) Y1.2@-675.12,2835.52 ; Y1.2@-700.32,2806.67 -732.31,2871.92 ; Y1.2@-694.94,2809.6 -732.31,2871.92 ; Y1.2@-692.48,2832.09 -787.48,2927.09 pad.1@-787.48,2987.09 ; Y1.2@-689.86,2812.94 -732.31,2871.92 ; Y1.2@-685.11,2816.67 -732.31,2871.92 ; Y1.2@-680.7,2820.76 -732.31,2871.92 ; Y1.2@-670.31,2834.01 -732.31,2871.92 ; Y1.2@-667.39,2839.27 -732.31,2871.92 ; Y1.2@-664.9,2844.78 -732.31,2871.92 ; Y1.2@-662.87,2850.51 -732.31,2871.92 ; Y1.2@-661.31,2856.43 -732.31,2871.92 ; -788.74,2954.44 pad.1@-787.48,2987.09 ; -788.74,2954.44 -778.8,2985.56 -788.18,2956.82 ; -788.18,2956.82 pad.1@-787.48,2987.09 ; -787.55,2957.27 pad.1@-787.48,2987.09 ; -787.55,2957.27 -796.2,2985.8 -787.48,2957.28 ; -787.55,2957.27 -778.77,2985.77 -787.48,2957.28 ; -787.48,2957.28 pad.1@-787.48,2987.09 ; pad.1@-787.48,2987.09 -786.22,2954.75 ; pad.1@-787.48,2987.09 -786.89,2956.96
  Bottom Layer w6: pad.1@-793.55,2993.47 -765.91,3013.66 ; pad.1@-787.48,2995.9 ccw(c-787.48,3005.1) -780.97,2998.59 ; pad.1@-784.67,2987.09 cw(c-765.81,2987.09) -779.15,3000.42 ; pad.1@-779.98,2982.46 -765.91,3013.66 ; pad.1@-778.67,2987.09 cw(c-745.33,2987.09) -768.9,3010.66 ; -747.95,3040.11 U3.5@-747.95,3063.03 ; U3.5@-747.95,3088.62 -747.95,3031.61 -787.48,2992.09 pad.1@-787.48,2987.09 -765.91,3013.66
NetC19_2: C19.2 pad.1@-832.48,2987.09 U3.6 Y1.1 | length 2203.7
  Top Layer w6: Y1.1@-912.48,2847.09 -867.17,2892.4 C19.2@-867.17,2987.09 pad.1@-837.48,2987.09 ; Y1.1@-911.69,2833.22 -887.74,2871.82 ; Y1.1@-906.08,2830.26 -887.74,2871.82 ; Y1.1@-900.25,2828.15 -887.74,2871.82 ; Y1.1@-894.27,2826.87 -887.74,2871.82 ; Y1.1@-888.25,2826.4 -887.74,2871.82 ; C19.2@-882.13,2982.88 -867.17,2949.8 ; C19.2@-877.99,2975.28 cw(c-904.12,2949.15) -867.17,2949.15 cw(c-830.21,2949.15) C19.2@-856.34,2975.28 ; C19.2@-876.4,2984.91 -867.17,2949.8 ; C19.2@-873.75,2979.52 cw(c-889.63,2963.63) -867.17,2963.63 cw(c-844.7,2963.63) C19.2@-860.58,2979.52 ; Y1.1@-871.71,2829.32 -887.74,2871.82 ; C19.2@-870.47,2985.95 -867.17,2949.8 ; C19.2@-867.17,2986.1 -867.17,2949.8 ; C19.2@-866.98,2983.78 pad.1@-837.48,2987.09 ; C19.2@-866.98,2990.39 pad.1@-837.48,2987.09 ; Y1.1@-866.21,2831.82 -887.74,2871.82 ; C19.2@-865.71,2977.89 pad.1@-837.48,2987.09 ; C19.2@-865.71,2996.28 pad.1@-837.48,2987.09 ; C19.2@-863.86,2985.95 -867.17,2949.8 ; C19.2@-863.22,2972.3 pad.1@-837.48,2987.09 ; C19.2@-863.22,3001.88 pad.1@-837.48,2987.09 ; Y1.1@-861.03,2835.07 -887.74,2871.82 ; C19.2@-857.93,2984.91 -867.17,2949.8 ; Y1.1@-856.27,2839.06 -887.74,2871.82 ; C19.2@-854.69,2978.21 cw(c-837.48,2965.96) pad.1@-837.48,2987.09 ; C19.2@-854.69,2995.96 ccw(c-837.48,3008.21) pad.1@-837.48,2987.09 ; C19.2@-852.2,2982.88 -867.17,2949.8 ; Y1.1@-852.02,2843.76 -887.74,2871.82 ; pad.1@-838.71,2980.86 ccw(c-853.75,2965.82) -853.75,2987.09 ccw(c-853.75,3008.36) pad.1@-838.71,2993.32 ; pad.1@-837.33,2979.73 C19.2@-860.78,3000.47 ; pad.1@-837.33,2994.44 C19.2@-860.78,2973.7 ; pad.1@-835.99,2979 C19.2@-861.78,2995 ; pad.1@-835.99,2995.17 C19.2@-861.78,2979.17 ; pad.1@-834.58,2978.53 C19.2@-862.23,2989.86 ; pad.1@-834.58,2995.64 C19.2@-862.23,2984.32 ; pad.1@-833.78,2978.37 C19.2@-862.29,2987.09 ; pad.1@-833.78,2995.8 C19.2@-862.29,2987.09 ; pad.1@-832.97,2978.29 C19.2@-862.23,2984.32 ; pad.1@-832.97,2995.88 C19.2@-862.23,2989.86 ; pad.1@-831.44,2978.34 C19.2@-861.78,2979.17 ; pad.1@-831.44,2995.84 C19.2@-861.78,2995 ; pad.1@-829.87,2978.67 C19.2@-860.78,2973.7 ; pad.1@-829.87,2995.5 C19.2@-860.78,3000.47 ; C19.2@-862.29,2987.09 pad.1@-832.48,2987.09 ; C19.2@-862.23,2984.32 pad.1@-832.48,2987.09 ; C19.2@-862.23,2989.86 pad.1@-832.48,2987.09 ; C19.2@-861.78,2979.17 pad.1@-832.48,2987.09 ; C19.2@-861.78,2995 pad.1@-832.48,2987.09 ; C19.2@-860.78,2973.7 pad.1@-832.48,2987.09 ; C19.2@-860.78,3000.47 pad.1@-832.48,2987.09
  Bottom Layer w6: pad.1@-836.43,2994.96 -802.57,3006.99 ; pad.1@-832.48,2989.9 ccw(c-832.48,3020.83) -810.61,2998.96 ; pad.1@-832.48,2995.9 ccw(c-832.48,3041.31) -800.37,3009.2 ; pad.1@-826.74,2980.41 -802.57,3006.99 ; U3.6@-767.64,3063.03 -767.64,3041.93 ; U3.6@-767.64,3088.62 -767.64,3041.93 ; -802.57,3006.99 pad.1@-832.48,2987.09 -822.48,2987.09 -767.64,3041.93
NetC22_1: C22.1 key1.1 pad.1@172.52,2547.09 pad.1@532.52,2322.09 pad.1@1157.52,2632.09 pad.1@-787.48,2827.09 pad.1@-842.48,2942.09 R11.2 U3.7 | length 5611.5
  Top Layer w6: pad.1@-847.87,2935.12 -817.94,2917.55 pad.1@-835.51,2947.48 ; pad.1@-842.48,2933.28 cw(c-842.48,2912) -827.44,2927.05 cw(c-812.4,2942.09) pad.1@-833.67,2942.09 ; pad.1@-842.48,2942.09 -787.48,2887.09 pad.1@-787.48,2827.09 ; pad.1@-796.19,2828.39 -787.48,2856.9 pad.1@-778.77,2828.39 ; pad.1@-793.71,2833.32 ccw(c-808.75,2848.36) -787.48,2848.36 ccw(c-766.21,2848.36) pad.1@-781.25,2833.32 ; pad.1@172.52,2547.09 417.52,2547.09 532.52,2432.09 pad.1@532.52,2327.09 ; pad.1@173.82,2538.37 202.33,2547.09 pad.1@173.82,2555.8 ; pad.1@178.75,2540.86 cw(c193.79,2525.82) 193.79,2547.09 cw(c193.79,2568.36) pad.1@178.75,2553.32 ; pad.1@523.81,2323.39 532.52,2351.9 ; pad.1@526.29,2328.32 ccw(c511.25,2343.36) 532.52,2343.36 ccw(c553.79,2343.36) pad.1@538.75,2328.32 ; pad.1@532.52,2322.09 532.52,2351.9 ; pad.1@541.23,2323.39 532.52,2351.9
  Bottom Layer w6: -861.06,2965.66 cw(c-884.63,2942.09) pad.1@-851.29,2942.09 ; -850.81,2955.42 cw(c-864.15,2942.09) pad.1@-845.29,2942.09 ; pad.1@-850.05,2937.58 -862.48,2967.09 ; -848.99,2953.59 ccw(c-842.48,2960.1) pad.1@-842.48,2950.9 ; pad.1@-842.48,2942.09 -862.48,2967.09 ; pad.1@-842.48,2947.09 -862.48,2967.09 ; pad.1@-836.42,2948.49 -862.48,2967.09 ; R11.2@-798.25,2814.92 -760.54,2790.15 ; R11.2@-794.59,2819.75 -760.54,2790.15 ; R11.2@-794.29,2821.5 -768.67,2797.21 ; R11.2@-794.14,2821.32 -766.6,2796.2 ; R11.2@-794.06,2821.22 -768.92,2799.67 ; R11.2@-793.88,2821.03 -768.44,2800.57 ; R11.2@-793.7,2820.85 -767.59,2801.01 ; R11.2@-793.49,2820.65 -765.43,2800.48 ; R11.2@-793.3,2820.48 -763.78,2800.33 ; -791.16,3058.41 ccw(c-795.78,3063.03) U3.7@-789.24,3063.03 ; R11.2@-790.36,2824.01 -760.54,2790.15 ; R11.2@-788.55,2835.83 R11.2@-774.21,2833.15 ; R11.2@-787.8,2810.8 cw(c-787.8,2794.85) -776.52,2806.12 ; R11.2@-787.8,2826.1 -760.54,2790.15 ; U3.7@-787.32,3088.62 -787.32,3062.24 -862.48,2987.09 -862.48,2967.09 ; R11.2@-785.09,2828 -760.54,2790.15 ; R11.2@-784.67,2827.09 ccw(c-753.74,2827.09) -775.61,2805.22 ; R11.2@-784.49,2826.1 ccw(c-755.5,2826.1) -776,2805.6 ; R11.2@-781.57,2820.55 R11.2@-774.21,2833.15 ; R11.2@-780.22,2832.07 -763.78,2800.33 ; R11.2@-780.03,2831.8 -765.43,2800.48 ; R11.2@-779.84,2830.93 -760.54,2790.15 ; R11.2@-779.82,2831.44 -767.59,2801.01 ; R11.2@-779.7,2831.21 -768.44,2800.57 ; R11.2@-779.65,2831.13 -766.6,2796.2 ; R11.2@-779.59,2831.01 -768.92,2799.67 ; R11.2@-779.5,2830.81 -768.67,2797.21 ; R11.2@-778.67,2827.09 ccw(c-733.26,2827.09) -765.37,2794.97 ; R11.2@-778.49,2826.1 ccw(c-735.01,2826.1) -765.75,2795.36 ; R11.2@-772.49,2826.1 ccw(c-714.53,2826.1) -755.51,2785.12 ; pad.1@166.29,2540.86 ccw(c151.25,2525.82) 151.25,2547.09 ccw(c151.25,2568.36) pad.1@166.29,2553.32 ; pad.1@167.52,2547.09 -517.48,2547.09 -787.48,2817.09 pad.1@-787.48,2827.09 ; pad.1@171.22,2538.37 142.71,2547.09 ; pad.1@171.22,2555.8 142.71,2547.09 ; pad.1@172.52,2547.09 142.71,2547.09 ; pad.1@532.52,2322.09 787.52,2322.09 1092.52,2627.09 pad.1@1167.52,2627.09 ; pad.1@533.82,2313.37 562.33,2322.09 pad.1@533.82,2330.8 ; pad.1@538.75,2315.86 cw(c553.79,2300.82) 553.79,2322.09 cw(c553.79,2343.36) pad.1@538.75,2328.32 ; 1124.18,2627.09 ccw(c1124.18,2665.43) 1151.29,2638.32 ccw(c1112.11,2677.5) 1167.52,2677.5 ; 1138.66,2627.09 ccw(c1138.66,2650.94) 1155.53,2634.07 ccw(c1126.59,2663.02) 1167.52,2663.02 ; C22.1@1148.1,2831.64 1167.52,2799.92 ; pad.1@1149.42,2635.55 1167.52,2666.71 ; C22.1@1152.68,2825.95 cw(c1116.85,2790.12) 1167.52,2790.12 ; C22.1@1153.53,2834.38 1167.52,2799.92 ; pad.1@1154.84,2640.48 1127.33,2627.09 ; C22.1@1156.92,2830.19 cw(c1131.34,2804.61) 1167.52,2804.61 ; pad.1@1157.52,2627.09 1167.52,2637.09 C22.1@1167.52,2837.09 ; pad.1@1157.69,2623.28 1127.33,2627.09 ; C22.1@1159.27,2836.18 1167.52,2799.92 ; pad.1@1159.77,2629.83 ccw(c1141.08,2648.53) 1167.52,2648.53 ; C22.1@1162.52,2836.77 1167.52,2799.92 ; C22.1@1165.81,2837.07 1167.52,2799.92 ; pad.1@1166.22,2630.7 1167.52,2666.71 ; 1167.52,2809.51 cw(c1190.76,2809.51) C22.1@1174.33,2825.95 ; C22.1@1171.83,2836.86 1167.52,2799.92 ; C22.1@1177.79,2835.66 1167.52,2799.92 ; pad.1@-787.48,2827.09 -768.92,2799.67 ; pad.1@-787.48,2827.09 -766.6,2796.2 ; pad.1@-787.48,2827.09 R11.2@-774.21,2833.15 ; pad.1@-787.48,2827.09 -763.78,2800.33 ; pad.1@-787.48,2827.09 -767.59,2801.01 ; pad.1@-787.48,2827.09 -765.43,2800.48 ; pad.1@-787.48,2827.09 -768.67,2797.21 ; pad.1@-787.48,2827.09 -768.44,2800.57 ; R11.2@-774.21,2833.15 -760.54,2790.15 ; 1127.33,2627.09 pad.1@1157.52,2632.09 1167.52,2666.71
NetC31_2: C31.2 pad.1@767.52,3177.09 U8.4 | length 355.4
  Bottom Layer w6: pad.1@767.52,3177.09 802.52,3177.09 837.52,3212.09 U8.4@892.52,3212.09 ; pad.1@768.82,3168.37 797.33,3177.09 pad.1@768.82,3185.8 ; pad.1@773.75,3170.86 cw(c788.79,3155.82) 788.79,3177.09 cw(c788.79,3198.36) pad.1@773.75,3183.32 ; U8.4@867.16,3205.86 ccw(c852.11,3190.82) 852.11,3212.09 ccw(c852.11,3233.36) U8.4@867.16,3218.32 ; U8.4@872.08,3203.37 843.57,3212.09 ; U8.4@872.08,3220.8 843.57,3212.09 ; U8.4@873.39,3212.09 843.57,3212.09